# EAGLE board Proiect_v132 (EAGLE 9.7.0)
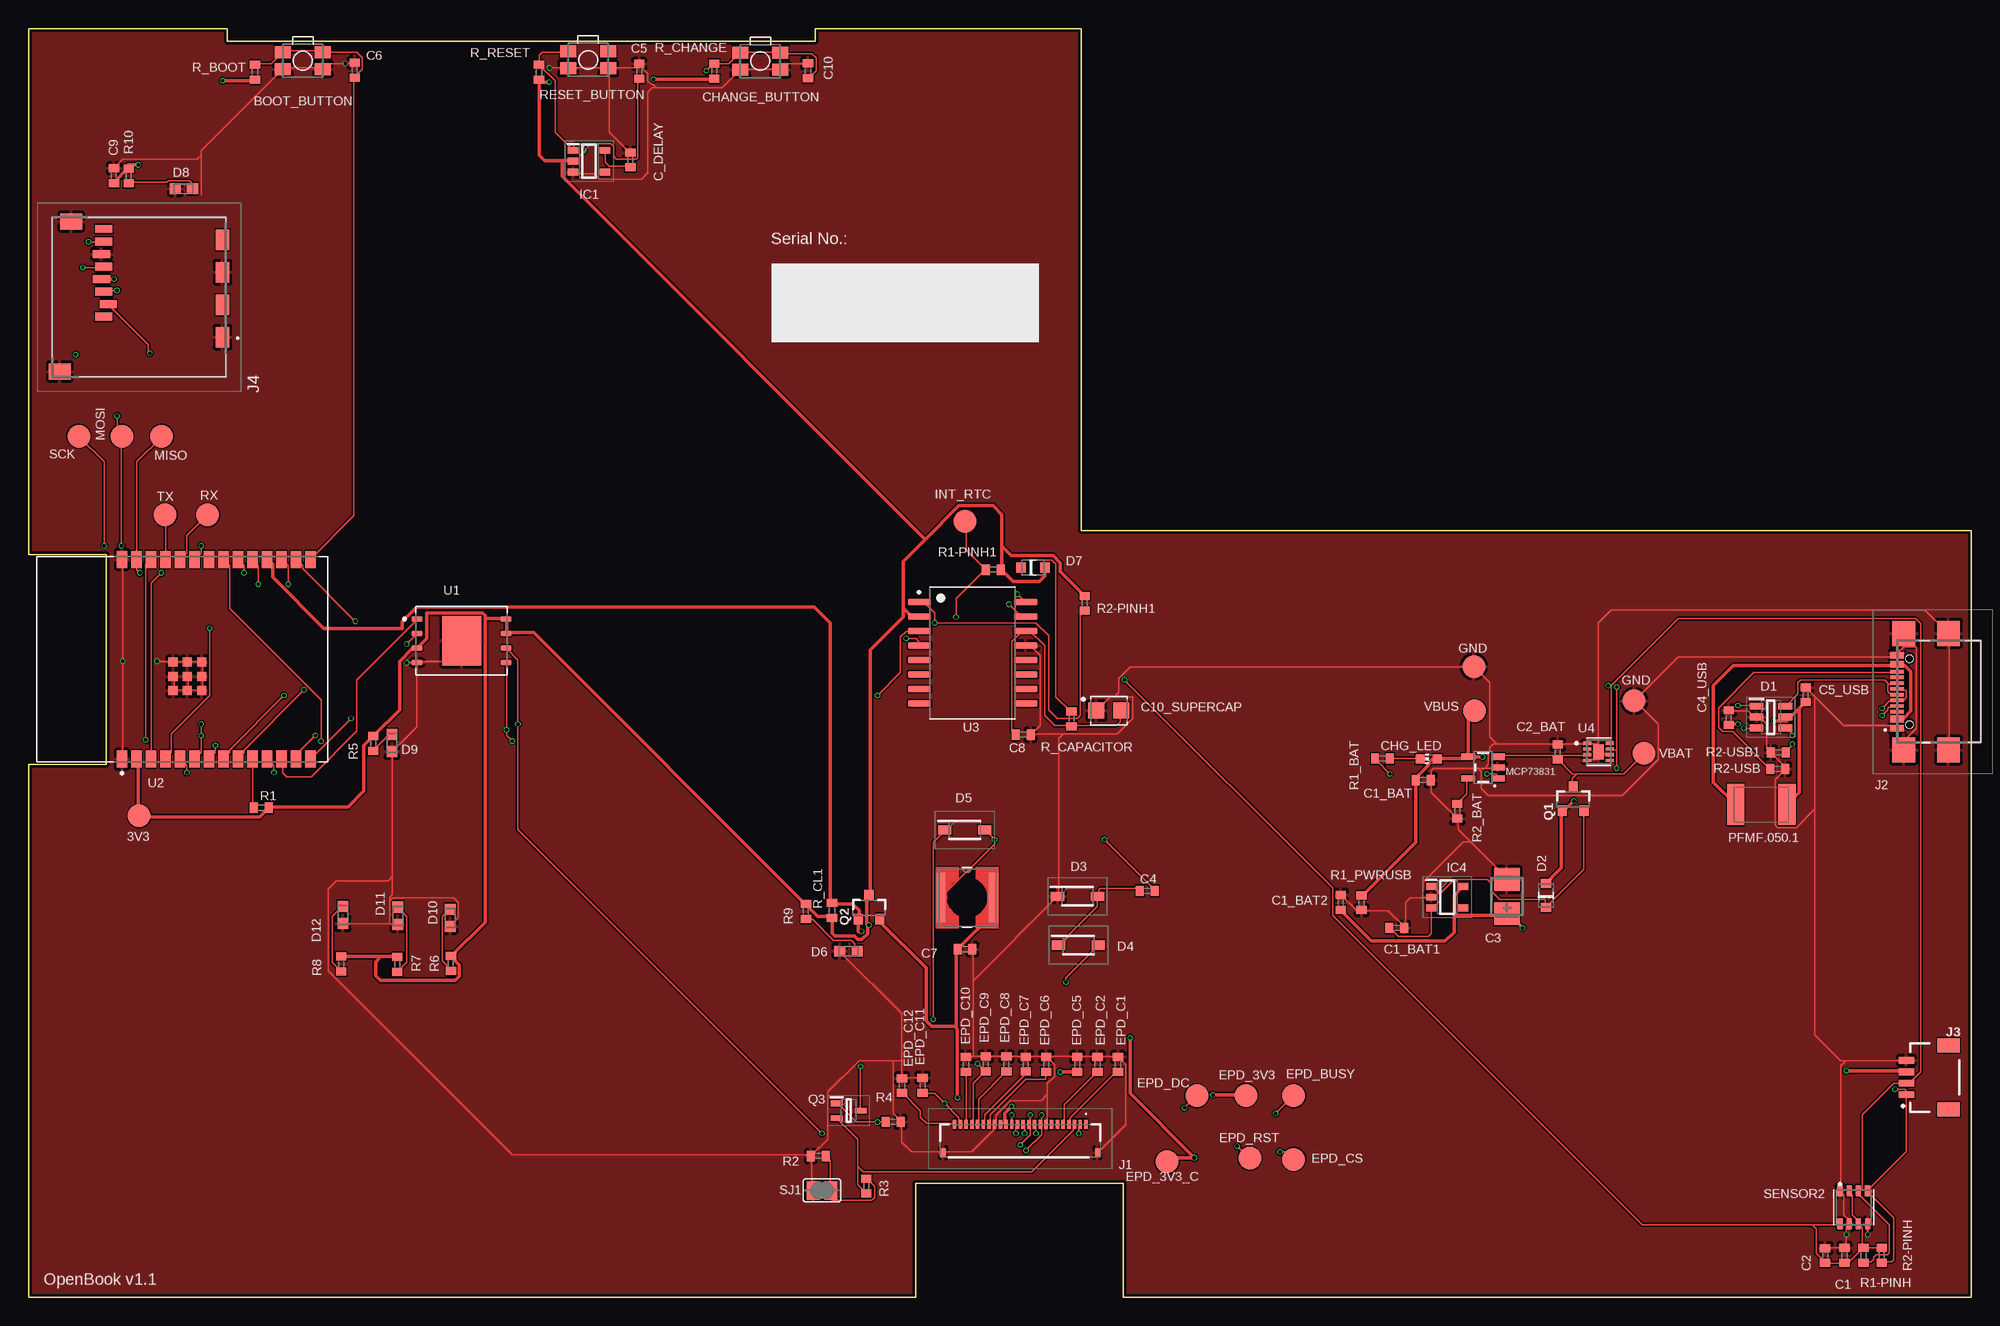
[diagram p0: board, top side]
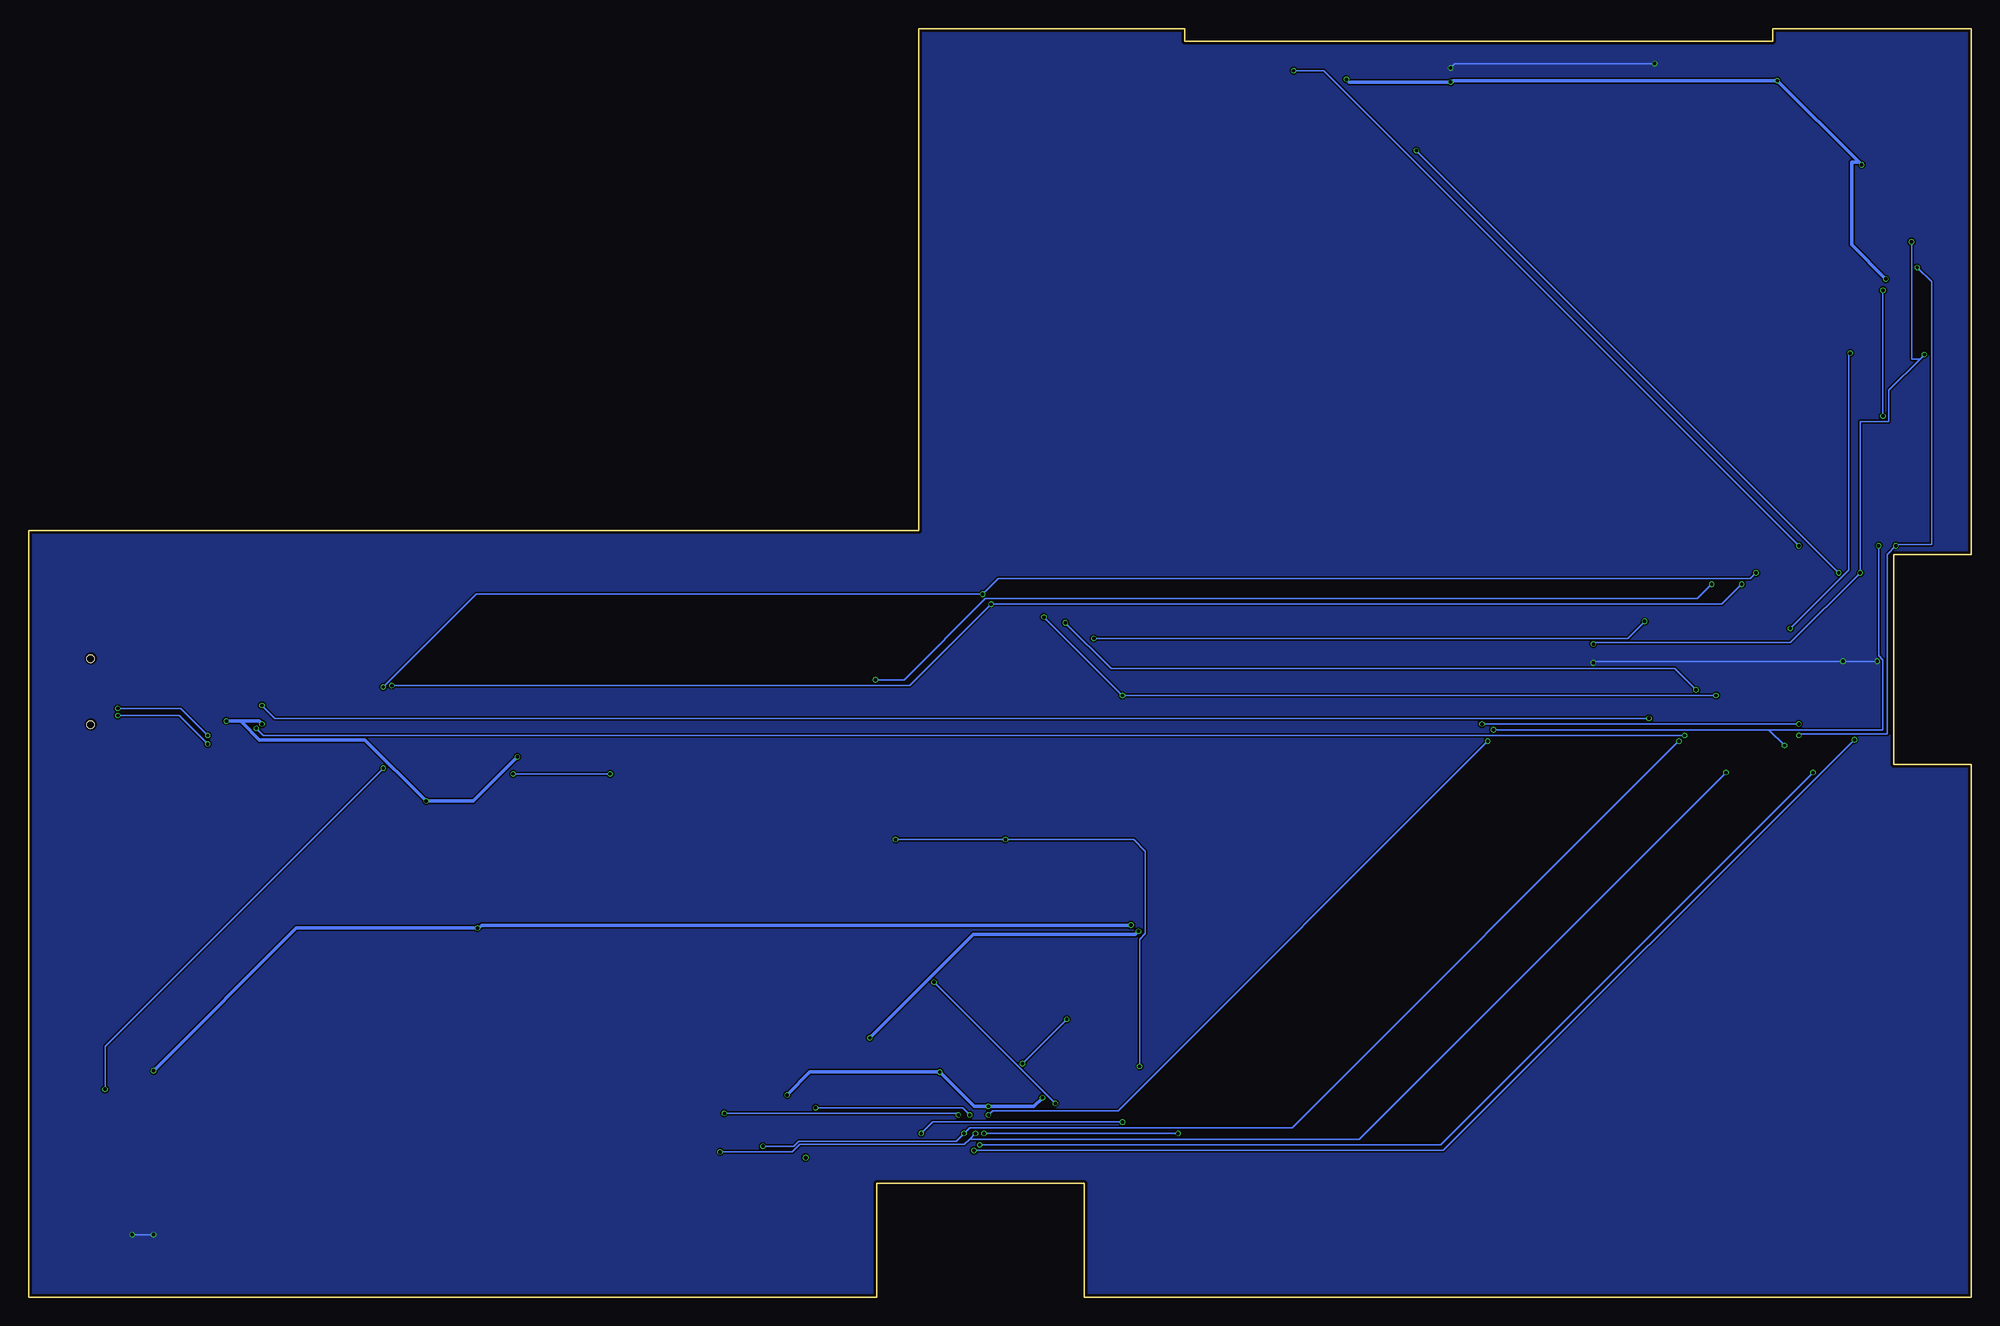
[diagram p1: board, bottom side, seen from below]

Size 170.2 x 111.2 mm. Coordinates in mm from the lower left corner, seen from the top.
Outline: 17.4,111.2 17.4,110.1 68.9,110.1 68.9,111.2 92.2,111.2 92.2,67.2 170.2,67.2 170.2,0 95.9,0 95.9,10 77.7,10 77.7,0 0,0 0,46.7 6.8,46.7 6.8,65.1 0,65.1 0,111.2 17.4,111.2
Copper layers (1*16): Top 0.035mm / dielectric 1.6mm / Bottom 0.035mm
Design rules "jlcpcb-2layers.dru": minimum track width 0.15mm, minimum drill 0.3mm, track to track 5mil, track to pad 5mil, pad to pad 5mil, via to via 5mil, smd to smd 5mil, copper to edge 0.2mm, drill to drill 6mil, minimum pad ring 10mil, minimum via ring 3mil, stop-mask expansion 4mil, vias tented up to drill 0mil, thermal gap 10mil
Net classes: 1 alimentare: width 0.3 mm

## Footprints (pad centres in the part's own frame; a part is rotated, then mirrored left to right if it is on the bottom)
MYBUTTON = smd 1.4 x 1.05: 1 1.75,0.75; 2 -1.75,0.75; 3 -1.75,-0.75; 4 1.75,-0.75
EAGLE-LTSPICE_C0402 = smd 0.7 x 0.9: 1 -0.65,0; 2 0.65,0
RCL_CT3528 = smd 2 x 2.2: + -1.5,0; - 1.5,0
CAPCP3225X100N = smd 1.4 x 1.4: 1 -1.1,0; 2 1.1,0
ADAFRUIT_CHIP-LED0603 = smd 0.8 x 0.8: A 0,-0.75; C 0,0.75
SOT95P280X145-6N = smd 1.2 x 0.6: 1 -1.25,0.95; 2 -1.25,0; 3 -1.25,-0.95; 4 1.25,-0.95; 5 1.25,0; 6 1.25,0.95
ESP32_WROVER_AVX---SD0805S020S1R0_AVX_SD0805S020S1R0_0 = smd 0.8 x 0.9: 1 -1.05,0; 2 1.05,0
SOD3716X135N = smd 1.15 x 0.8: 1 -1.75,0; 2 1.75,0
DIOC1608X36N = smd 0.97 x 0.94: 1 -0.75,0; 2 0.75,0
SOT95P280X125-5N = smd 0.9 x 0.6: 1 -1.4,0.95; 2 -1.4,0; 3 -1.4,-0.95; 4 1.4,-0.95; 5 1.4,0.95
SOT95P280X120-5N = smd 0.9 x 0.6: 1 -1.4,0.95; 2 -1.4,0; 3 -1.4,-0.95; 4 1.4,-0.95; 5 1.4,0.95
FH34SRJ24S05SH99 = smd 0.3 x 0.8: 1 5.75,1.45; 2 5.25,1.45; 3 4.75,1.45; 4 4.25,1.45; 5 3.75,1.45; 6 3.25,1.45; 7 2.75,1.45; 8 2.25,1.45; 9 1.75,1.45; 10 1.25,1.45; 11 0.75,1.45; 12 0.25,1.45; 13 -0.25,1.45; 14 -0.75,1.45; 15 -1.25,1.45; 16 -1.75,1.45; 17 -2.25,1.45; 18 -2.75,1.45; 19 -3.25,1.45; 20 -3.75,1.45; 21 -4.25,1.45; 22 -4.75,1.45; 23 -5.25,1.45; 24 -5.75,1.45 | smd 0.4 x 0.8: MP1 6.75,-1.05; MP2 -6.75,-1.05
SAMACSYS_PARTS_USB4110GFA = smd 0.3 x 1.15: A1 -3.35,3.678; A4 -2.55,3.678; A5 -1.25,3.678; A6 -0.25,3.678; A7 0.25,3.678; A8 1.25,3.678; A9 2.55,3.678; A12 3.35,3.678; B1 3.05,3.678; B4 2.25,3.678; B5 1.75,3.678; B6 0.75,3.678; B7 -0.75,3.678; B8 -1.75,3.678; B9 -2.25,3.678; B12 -3.05,3.678 | smd 2.18 x 2: MP1 -5.11,-0.827; MP2 5.11,-0.827; MP3 -5.11,3.103; MP4 5.11,3.103 | hole 0.65: -2.89,2.603; 2.89,2.603
JST04_1MM_RA = smd 0.6 x 1.35: 1 -1.5,0; 2 -0.5,0; 3 0.5,0; 4 1.5,0 | smd 1.2 x 2: NC1 2.8,-3.675; NC2 -2.8,-3.675
112ATAARR03ATTEND = smd 1.8 x 1.2: G1 10.6,10.4; G2 4.9,10.4; S1 7.75,10.4; S2 2.05,10.4 | smd 1.4 x 1.9: G3 13.6,-3.85; G4 0.45,-2.85 | smd 0.7 x 1.5: P1 8.8,0; P2 7.7,0.4; P3 6.6,0; P4 5.5,-0.2; P5 4.4,0; P6 3.3,-0.2; P7 2.2,0; P8 1.1,0
IND_4828-WE-TPC_WRE = smd 0.762 x 4.318: 1 -2.286,0; 2 2.286,0
ESP32_WROVER_SPARKFUN-IC-POWER_SOT23-5 = smd 0.55 x 1.2: 1 -0.95,-1.3; 2 0,-1.3; 3 0.95,-1.3; 4 0.95,1.3; 5 -0.95,1.3
ESP32C6_VARISTOR_CT/CN1812 = smd 1.5 x 3.6: 1 -2.25,0; 2 2.25,0
ESP32_WROVER_SPARKFUN-DISCRETESEMI_SOT23-3 = smd 0.8 x 0.9: 1 -0.95,-1; 2 0.95,-1; 3 0,1.1
SOT65P210X110-3N = smd 1.05 x 0.5: 1 -1.05,0.65; 2 -1.05,-0.65; 3 1.05,0
ESP32_WROVER_EAGLE-LTSPICE_R0402 = smd 0.7 x 0.9: 1 -0.65,0; 2 0.65,0
ESP32_WROVER_BME680_PSON80P300X300X100-8N = smd 1.016 x 0.5: 1 1.458,1.2; 2 1.458,0.4; 3 1.458,-0.4; 4 1.458,-1.2; 5 -1.458,-1.22; 6 -1.458,-0.4; 7 -1.458,0.4; 8 -1.458,1.2
SJ = smd 1.168 x 1.6: 1 -0.762,0; 2 0.762,0
TP20R = smd 2 x 2: TP 0,0
SON127P600X800X80-9N = smd 0.94 x 0.44: 1 -3.895,1.905; 2 -3.895,0.635; 3 -3.895,-0.635; 4 -3.895,-1.905; 5 3.895,-1.905; 6 3.895,-0.635; 7 3.895,0.635; 8 3.895,1.905 | smd 3.4 x 4.3: 9 0,0
XCVR_ESP32-C6-WROOM-1-N8 = smd 1.5 x 0.9: 1 -8.75,5.26; 2 -8.75,3.99; 3 -8.75,2.72; 4 -8.75,1.45; 5 -8.75,0.18; 6 -8.75,-1.09; 7 -8.75,-2.36; 8 -8.75,-3.63; 9 -8.75,-4.9; 10 -8.75,-6.17; 11 -8.75,-7.44; 12 -8.75,-8.71; 13 -8.75,-9.98; 14 -8.75,-11.25; 15 8.75,-11.25; 16 8.75,-9.98; 17 8.75,-8.71; 18 8.75,-7.44; 19 8.75,-6.17; 20 8.75,-4.9; 21 8.75,-3.63; 22 8.75,-2.36; 23 8.75,-1.09; 24 8.75,0.18; 25 8.75,1.45; 26 8.75,2.72; 27 8.75,3.99; 28 8.75,5.26 | smd 0.8 x 0.8: 29_1 -2.755,0.79; 29_2 -1.505,0.79; 29_3 -0.255,0.79; 29_4 -2.755,-0.46; 29_5 -1.505,-0.46; 29_6 -0.255,-0.46; 29_7 -2.755,-1.71; 29_8 -1.505,-1.71; 29_9 -0.255,-1.71
SOIC127P1032X265-16N = smd 2.05 x 0.59: 1 -4.655,4.445; 2 -4.655,3.175; 3 -4.655,1.905; 4 -4.655,0.635; 5 -4.655,-0.635; 6 -4.655,-1.905; 7 -4.655,-3.175; 8 -4.655,-4.445; 9 4.655,-4.445; 10 4.655,-3.175; 11 4.655,-1.905; 12 4.655,-0.635; 13 4.655,0.635; 14 4.655,1.905; 15 4.655,3.175; 16 4.655,4.445
SON50P200X200X80-9N = smd 0.76 x 0.27: 1 -0.985,0.75; 2 -0.985,0.25; 3 -0.985,-0.25; 4 -0.985,-0.75; 5 0.985,-0.75; 6 0.985,-0.25; 7 0.985,0.25; 8 0.985,0.75 | smd 0.9 x 1.3: 9 0,0

## Placement (x,y rotation side)
BOOT_BUTTON  BUTTON_CUSYOMV1.  [MYBUTTON]  24.03,108.39 180 top
C1  100nF  [EAGLE-LTSPICE_C0402]  159.08,3.69 90 top
C1_BAT  4.7uF  [EAGLE-LTSPICE_C0402]  122.18,45.34 0 top
C1_BAT1  4.7uF  [EAGLE-LTSPICE_C0402]  119.86,32.38 0 top
C1_BAT2  4.7uF  [EAGLE-LTSPICE_C0402]  114.94,34.63 90 top
C2  100nF  [EAGLE-LTSPICE_C0402]  157.38,3.67 90 top
C2_BAT  4.7uF  [EAGLE-LTSPICE_C0402]  133.96,47.79 90 top
C3  100uF  [RCL_CT3528]  129.51,35.14 90 top
C4  4.7uF/25V  [EAGLE-LTSPICE_C0402]  98.01,35.63 0 top
C4_USB  100nF  [EAGLE-LTSPICE_C0402]  148.94,50.81 90 top
C5  1uF  [EAGLE-LTSPICE_C0402]  53.5,107.46 90 top
C5_USB  4.7uF  [EAGLE-LTSPICE_C0402]  155.69,52.82 90 top
C6  100nF  [EAGLE-LTSPICE_C0402]  28.58,107.55 90 top
C7  10uF  [EAGLE-LTSPICE_C0402]  82.04,30.52 0 top
C8  100nF  [EAGLE-LTSPICE_C0402]  87.13,49.32 0 top
C9  100nF  [EAGLE-LTSPICE_C0402]  7.48,98.31 90 top
C10  100nF  [EAGLE-LTSPICE_C0402]  68.28,107.49 90 top
C10_SUPERCAP  CPH3225A  [CAPCP3225X100N]  94.64,51.43 0 top
C_DELAY  100nF  [EAGLE-LTSPICE_C0402]  52.72,99.68 90 top
CHANGE_BUTTON  BUTTON_CUSYOMV1.  [MYBUTTON]  64.11,108.35 180 top
CHG_LED  [ADAFRUIT_CHIP-LED0603]  122.66,47.19 90 top
D1  USBLC6-2SC6Y  [SOT95P280X145-6N]  152.63,50.86 0 top
D2  ESP32_WROVER_AVX---SD0805S020S1R0_AVX_SD0805S020S1R0_0_0AVX_SD0805S020S1R0_0_0  [ESP32_WROVER_AVX---SD0805S020S1R0_AVX_SD0805S020S1R0_0]  132.93,35.24 90 top
D3  MBR0530  [SOD3716X135N]  91.89,35.16 0 top
D4  MBR0530  [SOD3716X135N]  91.97,30.87 0 top
D5  MBR0530  [SOD3716X135N]  82.01,40.97 0 top
D6  PGB1010603MR.  [DIOC1608X36N]  71.83,30.36 0 top
D7  ESP32_WROVER_AVX---SD0805S020S1R0_AVX_SD0805S020S1R0_0_0AVX_SD0805S020S1R0_0_0  [ESP32_WROVER_AVX---SD0805S020S1R0_AVX_SD0805S020S1R0_0]  87.99,63.97 0 top
D8  PGB1010603MR.  [DIOC1608X36N]  13.61,97.16 0 top
D9  PGB1010603MR.  [DIOC1608X36N]  31.84,48.59 90 top
D10  PGB1010603MR.  [DIOC1608X36N]  36.94,33.27 90 top
D11  PGB1010603MR.  [DIOC1608X36N]  32.34,33.45 90 top
D12  PGB1010603MR.  [DIOC1608X36N]  27.54,33.53 90 top
EPD_C1  1uF/50V  [EAGLE-LTSPICE_C0402]  95.44,20.43 90 top
EPD_C2  1uF/50V  [EAGLE-LTSPICE_C0402]  93.64,20.44 90 top
EPD_C5  1uF/50V  [EAGLE-LTSPICE_C0402]  91.86,20.43 90 top
EPD_C6  1uF/50V  [EAGLE-LTSPICE_C0402]  89.16,20.44 90 top
EPD_C7  1uF/50V  [EAGLE-LTSPICE_C0402]  87.36,20.45 90 top
EPD_C8  1uF/50V  [EAGLE-LTSPICE_C0402]  85.66,20.46 90 top
EPD_C9  1uF/50V  [EAGLE-LTSPICE_C0402]  83.86,20.47 90 top
EPD_C10  1uF/50V  [EAGLE-LTSPICE_C0402]  82.12,20.42 90 top
EPD_C11  1uF/50V  [EAGLE-LTSPICE_C0402]  78.32,18.6 90 top
EPD_C12  1uF/50V  [EAGLE-LTSPICE_C0402]  76.52,18.56 90 top
IC1  BD5229G-TR  [SOT95P280X125-5N]  49.1,99.56 0 top
IC4  XC6220A331MR-GIC4  [SOT95P280X120-5N]  124.28,35.08 0 top
J1  FH34SRJ-24S-0.5SH_99_  [FH34SRJ24S05SH99]  86.88,13.73 0 top
J2  SAMACSYS_PARTS_USB4110-GF-A  [SAMACSYS_PARTS_USB4110GFA]  167.36,53.08 90 top
J3  QWIIC_RIGHT_ANGLE  [JST04_1MM_RA]  164.51,19.28 90 top
J4  112A-TAAR-R03_ATTEND  [112ATAARR03ATTEND]  6.59,94.74 270 top
L1  68uH  [IND_4828-WE-TPC_WRE]  82.22,35.04 0 top
MCP73831  ESP32_WROVER_SPARKFUN-IC-POWER_MCP73831  [ESP32_WROVER_SPARKFUN-IC-POWER_SOT23-5]  127.42,46.44 90 top
PFMF.050.1  ESP32C6_VARISTORCN1812  [ESP32C6_VARISTOR_CT/CN1812]  151.79,43.19 0 top
Q1  20V/4.2A/52mΩ/1.4W  [ESP32_WROVER_SPARKFUN-DISCRETESEMI_SOT23-3]  135.31,43.65 0 top
Q2  20V/4.2A/52mΩ/1.4W  [ESP32_WROVER_SPARKFUN-DISCRETESEMI_SOT23-3]  73.63,34.15 0 top
Q3  SI1308EDL-T1-GE3  [SOT65P210X110-3N]  71.84,16.37 0 top
R1  10K  [ESP32_WROVER_EAGLE-LTSPICE_R0402]  20.4,42.92 0 top
R1-PINH  10K  [ESP32_WROVER_EAGLE-LTSPICE_R0402]  160.74,3.69 90 top
R1-PINH1  10K  [ESP32_WROVER_EAGLE-LTSPICE_R0402]  84.5,63.78 0 top
R1_BAT  200  [ESP32_WROVER_EAGLE-LTSPICE_R0402]  118.6,47.24 0 top
R1_PWRUSB  100K  [ESP32_WROVER_EAGLE-LTSPICE_R0402]  116.77,34.6 90 top
R2  2.2  [ESP32_WROVER_EAGLE-LTSPICE_R0402]  69.18,12.4 0 top
R2-PINH  10K  [ESP32_WROVER_EAGLE-LTSPICE_R0402]  162.34,3.7 90 top
R2-PINH1  10K  [ESP32_WROVER_EAGLE-LTSPICE_R0402]  92.52,60.84 90 top
R2-USB  5k1  [ESP32_WROVER_EAGLE-LTSPICE_R0402]  153.23,46.32 0 top
R2-USB1  5k1  [ESP32_WROVER_EAGLE-LTSPICE_R0402]  153.27,47.76 0 top
R2_BAT  2K  [ESP32_WROVER_EAGLE-LTSPICE_R0402]  125.16,42.61 90 top
R3  0.47  [ESP32_WROVER_EAGLE-LTSPICE_R0402]  73.38,9.76 90 top
R4  10K  [ESP32_WROVER_EAGLE-LTSPICE_R0402]  75.74,15.4 0 top
R5  10K  [ESP32_WROVER_EAGLE-LTSPICE_R0402]  30.2,48.56 90 top
R6  10K  [ESP32_WROVER_EAGLE-LTSPICE_R0402]  37,29.28 90 top
R7  10K  [ESP32_WROVER_EAGLE-LTSPICE_R0402]  32.3,29.2 90 top
R8  10K  [ESP32_WROVER_EAGLE-LTSPICE_R0402]  27.4,29.22 90 top
R9  10K  [ESP32_WROVER_EAGLE-LTSPICE_R0402]  68.1,33.84 90 top
R10  10K  [ESP32_WROVER_EAGLE-LTSPICE_R0402]  8.78,98.28 90 top
R_BOOT  10K  [ESP32_WROVER_EAGLE-LTSPICE_R0402]  19.84,107.38 90 top
R_CAPACITOR  15  [ESP32_WROVER_EAGLE-LTSPICE_R0402]  91.37,50.7 90 top
R_CHANGE  10K  [ESP32_WROVER_EAGLE-LTSPICE_R0402]  60.07,107.47 90 top
R_CL1  10K  [ESP32_WROVER_EAGLE-LTSPICE_R0402]  70.38,33.91 90 top
R_RESET  10K  [ESP32_WROVER_EAGLE-LTSPICE_R0402]  44.72,107.36 90 top
RESET_BUTTON  BUTTON_CUSYOMV1.  [MYBUTTON]  49.02,108.45 180 top
SENSOR2  ESP32_WROVER_BME680_BME680  [ESP32_WROVER_BME680_PSON80P300X300X100-8N]  159.89,7.9 90 top
SJ1  [SJ]  69.51,9.38 0 top
TP1  TPTP20R  [TP20R]  11.96,68.58 0 top
TP2  TPTP20R  [TP20R]  15.68,68.58 0 top
TP3  TPTP20R  [TP20R]  141.5,47.68 0 top
TP4  TPTP20R  [TP20R]  126.62,55.28 0 top
TP5  TPTP20R  [TP20R]  140.64,52.28 0 top
TP6  TPTP20R  [TP20R]  11.66,75.48 0 top
TP7  TPTP20R  [TP20R]  8.18,75.48 0 top
TP8  TPTP20R  [TP20R]  4.4,75.48 0 top
TP9  TPTP20R  [TP20R]  110.82,17.68 0 top
TP10  TPTP20R  [TP20R]  110.83,12.1 0 top
TP11  TPTP20R  [TP20R]  102.34,17.68 0 top
TP12  TPTP20R  [TP20R]  106.98,12.2 0 top
TP13  TPTP20R  [TP20R]  99.73,11.9 0 top
TP14  TPTP20R  [TP20R]  126.68,51.4 0 top
TP15  TPTP20R  [TP20R]  82.03,68 0 top
TP16  TPTP20R  [TP20R]  9.68,42.2 0 top
TP17  TPTP20R  [TP20R]  106.63,17.7 0 top
U1  W25Q512JVEIQ  [SON127P600X800X80-9N]  37.94,57.55 0 top
U2  ESP32-C6-WROOM-1-N8  [XCVR_ESP32-C6-WROOM-1-N8]  13.45,55.93 90 top
U3  DS3231SN#  [SOIC127P1032X265-16N]  82.7,56.49 0 top
U4  MAX17048G+T10  [SON50P200X200X80-9N]  137.53,47.81 0 top

## Library data of the parts
BOOT_BUTTON C1 C1_BAT C1_BAT1 C1_BAT2 C2 C2_BAT C4 C4_USB C5 C5_USB C6-C10 C_DELAY CHANGE_BUTTON CHG_LED D6 D8-D12 EPD_C1 EPD_C2 EPD_C5-EPD_C12 IC4 PFMF.050.1 R1 R1-PINH R1-PINH1 R1_BAT R1_PWRUSB R2 R2-PINH R2-PINH1 R2-USB R2-USB1 R2_BAT R3-R10 R_BOOT R_CAPACITOR R_CHANGE R_CL1 R_RESET RESET_BUTTON SJ1 TP1-TP17 = DeskAssistant v19 v1
C3 = DeskAssistant v19 v1; SPICEPREFIX: C
C10_SUPERCAP = DeskAssistant v19 v1; AVAILABILITY: Not in stock; CHECK_PRICES: https://www.snapeda.com/parts/CPH3225A/Seiko+Instruments/view-part/?ref=eda; DESCRIPTION: 11 mF (EDLC) Supercapacitor 3.3 V 1210 (3225 Metric) - -; MF: Seiko Instruments; MP: CPH3225A; PACKAGE: 1210 Seiko; PRICE: None; PURCHASE-URL: https://www.snapeda.com/api/url_track_click_mouser/?unipart_id=562593&manufacturer=Seiko Instruments&part_name=CPH3225A&search_term=None; SNAPEDA_LINK: https://www.snapeda.com/parts/CPH3225A/Seiko+Instruments/view-part/?ref=snap
D1 = DeskAssistant v19 v1; AVAILABILITY: In Stock; CHECK_PRICES: https://www.snapeda.com/parts/USBLC6-2SC6Y/STMicroelectronics/view-part/?ref=eda; DESCRIPTION: 17V Clamp 5A (8/20µs) Ipp Tvs Diode Surface Mount SOT-23-6; MF: STMicroelectronics; MP: USBLC6-2SC6Y; PACKAGE: SOT-23-6 STMicroelectronics; PRICE: None; SNAPEDA_LINK: https://www.snapeda.com/parts/USBLC6-2SC6Y/STMicroelectronics/view-part/?ref=snap
D2 D7 = DeskAssistant v19 v1; ATR: SD0805S020S1R0; CENTROID_NOT_SPECIFIED: No; DATASHEET: http://datasheets.avx.com/schottky.pdf; DIGIKEY_DESCRIPTION: DIODE SCHOTTKY 20V 1A 0805; DIGIKEY_PART_NUMBER: 478-7800-1-ND; LEAD_FREE: yes; MF: AVX; MOUSER_PART_NUMBER: 581-SD0805S020S1R0; PACKAGE: 0805 (2012 metric); PREFIX: D; ROHS: yes; TEMPERATURE_RANGE_HIGH: +125°C; TEMPERATURE_RANGE_LOW: -55°C
D3-D5 = DeskAssistant v19 v1; AVAILABILITY: In Stock; CHECK_PRICES: https://www.snapeda.com/parts/MBR0530/Onsemi/view-part/?ref=eda; DESCRIPTION: Diode Schottky 30 V 500mA Surface Mount SOD-123; MF: ON Semiconductor; MP: MBR0530; PACKAGE: SOD-123-2 ON Semiconductor; PRICE: None; PURCHASE-URL: https://www.snapeda.com/api/url_track_click_mouser/?unipart_id=179458&manufacturer=ON Semiconductor&part_name=MBR0530&search_term=None; SNAPEDA_LINK: https://www.snapeda.com/parts/MBR0530/Onsemi/view-part/?ref=snap
IC1 = DeskAssistant v19 v1; DESCRIPTION: Voltage Detector with Adjustable Delay Time: CMOS processes are utilized to develop high precision, low current consumption CMOS reset ICs that allow arbitrary setting of the delay time. The extensive lineup includes both Nch Open Drain and CMOS output types in a wide range of detection voltages (from 2.3V to 6.0V, in 0.1V steps), enabling selection of the ideal solution based on customer requirements. In addition, the entire series is of course both lead-free and RoHS-compliant.; HEIGHT: 1.25mm; MANUFACTURER_NAME: ROHM Semiconductor; MANUFACTURER_PART_NUMBER: BD5229G-TR; MOUSER_PART_NUMBER: 755-BD5229G-TR; MOUSER_PRICE-STOCK: https://www.mouser.co.uk/ProductDetail/ROHM-Semiconductor/BD5229G-TR?qs=4kLU8WoGk0vvnhrrYwdszw%3D%3D
J1 = DeskAssistant v19 v1; DESCRIPTION: 24 Position FFC, FPC Connector Contacts, Top and Bottom 0.020" (0.50mm) Surface Mount, Right Angle; HEIGHT: 1.1mm; MANUFACTURER_NAME: Hirose; MANUFACTURER_PART_NUMBER: FH34SRJ-24S-0.5SH(99); MOUSER_PART_NUMBER: 798-FH34SRJ24S05SH99; MOUSER_PRICE-STOCK: https://www.mouser.co.uk/ProductDetail/Hirose-Connector/FH34SRJ-24S-0.5SH99?qs=vcbW%252B4%252BSTIpKBl5ap9J8Fw%3D%3D
J2 = DeskAssistant v19 v1; DESCRIPTION: CONN USB 2.0 TYPE-C R/A SMT; HEIGHT: 3.26mm; MANUFACTURER_NAME: GCT (GLOBAL CONNECTOR TECHNOLOGY); MANUFACTURER_PART_NUMBER: USB4110-GF-A; MOUSER_PART_NUMBER: 640-USB4110-GF-A; MOUSER_PRICE-STOCK: https://www.mouser.co.uk/ProductDetail/GCT/USB4110-GF-A?qs=KUoIvG%2F9IlYiZvIXQjyJeA%3D%3D
J3 = DeskAssistant v19 v1; PROD_ID: CONN-13694
J4 = DeskAssistant v19 v1; DESCRIPTION: Micro SD Card Socket, Push-Push Type, Top Mount, SMT, H=1.83mm, 10u; HEIGHT: 1.9mm; MANUFACTURER_NAME: ATTEND; MANUFACTURER_PART_NUMBER: 112A-TAAR-R03 ATTEND
L1 = DeskAssistant v19 v1; COPYRIGHT: Copyright (C) 2024 Ultra Librarian. All rights reserved.; MANUFACTURER_PART_NUMBER: 744043680; MFR_NAME: Wurth Electronics
MCP73831 = DeskAssistant v19 v1; PROD_ID: IC-09995
Q1 Q2 = DeskAssistant v19 v1; ATR: DMG2305UX-7; PROD_ID: TRAN-14388
Q3 = DeskAssistant v19 v1; AVAILABILITY: In Stock; CHECK_PRICES: https://www.snapeda.com/parts/SI1308EDL-T1-GE3/Vishay+Siliconix/view-part/?ref=eda; DESCRIPTION: Si1308EDL-T1-GE3 N-channel MOSFET Transistor, 1.5 A, 30 V, 3-Pin SC-70 | Siliconix / Vishay SI1308EDL-T1-GE3; MF: Vishay Siliconix; MP: SI1308EDL-T1-GE3; PACKAGE: SOT-323 Vishay Semiconductor; PRICE: None; PURCHASE-URL: https://www.snapeda.com/api/url_track_click_mouser/?unipart_id=274603&manufacturer=Vishay Siliconix&part_name=SI1308EDL-T1-GE3&search_term=None; SNAPEDA_LINK: https://www.snapeda.com/parts/SI1308EDL-T1-GE3/Vishay+Siliconix/view-part/?ref=snap
SENSOR2 = DeskAssistant v19 v1; ATR: BME688; AVAILABILITY: Unavailable; DESCRIPTION: Integrated Environmental Unit; MF: Bosch Sensortec; MP: BME680; PACKAGE: LGA-8 Bosch Tools; PRICE: None
U1 = DeskAssistant v19 v1; AVAILABILITY: In Stock; CHECK_PRICES: https://www.snapeda.com/parts/W25Q512JVEIQ/Winbond+Electronics/view-part/?ref=eda; DESCRIPTION: FLASH - NOR Memory IC 512Mb (64M x 8) SPI - Quad I/O 133 MHz 8-WSON (8x6); MF: Winbond Electronics; MP: W25Q512JVEIQ; PACKAGE: Package; PRICE: None; SNAPEDA_LINK: https://www.snapeda.com/parts/W25Q512JVEIQ/Winbond+Electronics/view-part/?ref=snap
U2 = DeskAssistant v19 v1; AVAILABILITY: In Stock; CHECK_PRICES: https://www.snapeda.com/parts/ESP32-C6-WROOM-1-N8/Espressif+Systems/view-part/?ref=eda; DESCRIPTION: Multiprotocol Modules ESP32-C6 module, Wi-Fi 6 in 2.4 GHz band, Bluetooth 5, Zigbee 3.0 and Thread. ESP34-WROOM Compatible - ENGINEERING SAMPLE; MF: Espressif Systems; MP: ESP32-C6-WROOM-1-N8; PACKAGE: None; PRICE: None; SNAPEDA_LINK: https://www.snapeda.com/parts/ESP32-C6-WROOM-1-N8/Espressif+Systems/view-part/?ref=snap
U3 = DeskAssistant v19 v1; AVAILABILITY: In Stock; CHECK_PRICES: https://www.snapeda.com/parts/DS3231SN%23/Analog+Devices/view-part/?ref=eda; DESCRIPTION: Extremely Accurate I²C-Integrated RTC/TCXO/Crystal; MF: Analog Devices; MP: DS3231SN#; PACKAGE: SOIC-16 Maxim; PRICE: None; PURCHASE-URL: https://www.snapeda.com/api/url_track_click_mouser/?unipart_id=99048&manufacturer=Analog Devices&part_name=DS3231SN#&search_term=None; SNAPEDA_LINK: https://www.snapeda.com/parts/DS3231SN%23/Analog+Devices/view-part/?ref=snap
U4 = DeskAssistant v19 v1; AVAILABILITY: In Stock; CHECK_PRICES: https://www.snapeda.com/parts/MAX17048G+T10/Analog+Devices/view-part/?ref=eda; DESCRIPTION: 3µA 1-Cell/2-Cell Fuel Gauge with ModelGauge; MF: Analog Devices; MP: MAX17048G+T10; PACKAGE: TDFN-8 Maxim; PRICE: None; PURCHASE-URL: https://www.snapeda.com/api/url_track_click_mouser/?unipart_id=329239&manufacturer=Analog Devices&part_name=MAX17048G+T10&search_term=None; SNAPEDA_LINK: https://www.snapeda.com/parts/MAX17048G+T10/Analog+Devices/view-part/?ref=snap

## Nets
3V3 [alimentare]: C1_BAT2.1 C3.+ C9.1 D7.2 IC1.2 IC4.5 J3.3 J4.P4 Q2.3 R1-PINH1.2 R1.2 R2-PINH1.2 R5.2 R6.2 R7.2 R8.2 R9.2 R10.2 R_BOOT.1 R_CHANGE.1 R_CL1.1 R_RESET.1 TP16.TP U1.3 U1.7 U1.8 U2.2 U3.2
32KHZ: R2-PINH1.1 U2.9 U3.1
DN: D1.4 J2.A7 J2.B7
DP: D1.6 J2.A6 J2.B6
EPD_3V3 [alimentare]: C7.1 EPD_C5.1 J1.15 J1.16 L1.2 Q2.2 TP17.TP
EPD_3V3_C [alimentare]: Q2.1 R_CL1.2 TP13.TP U2.18
EPD_BUSY: J1.9 TP9.TP U2.26
EPD_CS: J1.12 TP10.TP U2.11
EPD_DC: J1.11 TP11.TP U2.5
EPD_RST: J1.10 TP12.TP U2.21
FLASH_CS: U1.1 U2.12
GDR: J1.2 Q3.1 R4.1
GND: BOOT_BUTTON.1 BOOT_BUTTON.2 C1.2 C1_BAT1.2 C1_BAT2.2 C1_BAT.2 C2.2 C2_BAT.2 C3.- C4_USB.2 C5.2 C5_USB.2 C6.2 C7.2 C8.2 C9.2 C10.2 C10_SUPERCAP.1 C_DELAY.2 CHANGE_BUTTON.1 CHANGE_BUTTON.2 D1.2 D3.1 D6.1 D8.1 D9.1 D10.1 D11.1 D12.1 EPD_C1.2 EPD_C2.2 EPD_C5.2 EPD_C6.2 EPD_C7.2 EPD_C8.2 EPD_C9.2 EPD_C10.2 EPD_C11.2 EPD_C12.2 IC1.3 IC4.2 J1.8 J1.17 J1.MP1 J1.MP2 J2.A1 J2.A12 J2.B1 J2.B12 J2.MP1 J2.MP2 J2.MP3 J2.MP4 J3.4 J4.G1 J4.G2 J4.G3 J4.G4 J4.P6 MCP73831.2 R1_PWRUSB.1 R2-USB1.1 R2-USB.2 R2.1 R2_BAT.1 R4.2 RESET_BUTTON.1 RESET_BUTTON.2 SENSOR2.1 SENSOR2.5 SENSOR2.7 SJ1.1 TP4.TP TP5.TP U1.4 U1.9 U2.1 U2.28 U2.29_1 U2.29_2 U2.29_3 U2.29_4 U2.29_5 U2.29_6 U2.29_7 U2.29_8 U2.29_9 U3.13 U4.1 U4.4 U4.6 U4.9
GPIO8: R1.1 U2.10
I2C_PW: C1.1 C2.1 R1-PINH.2 R2-PINH.2 SENSOR2.2 SENSOR2.6 SENSOR2.8 U2.17
INT_RTC: R1-PINH1.1 TP15.TP U2.8 U3.3
IO/BOOT: BOOT_BUTTON.3 BOOT_BUTTON.4 C6.1 R_BOOT.2 U2.15
IO/CHANGE: C10.1 CHANGE_BUTTON.3 CHANGE_BUTTON.4 R_CHANGE.2 U2.23
MISO: J4.P7 TP6.TP U1.2 U2.27
MOSI: J1.14 J4.P3 TP7.TP U1.5 U2.7
N$1: J2.B5 R2-USB.1
N$2: C_DELAY.1 IC1.5
N$3: EPD_C12.1 J1.24
N$4: C1_BAT1.1 D2.1 IC4.1 IC4.3 Q1.2
N$5: MCP73831.5 R2_BAT.2
N$6: CHG_LED.C R1_BAT.2
N$8: MCP73831.1 R1_BAT.1
N$9: C4.1 D3.2 D4.1
N$10: D12.2 R8.1
N$11: J2.A5 R2-USB1.2
N$12: D11.2 R7.1
N$13: EPD_C10.1 J1.22
N$14: D10.2 R6.1
N$15: EPD_C8.1 J1.20
N$16: EPD_C7.1 J1.19
N$17: EPD_C6.1 J1.18
N$18: D9.2 R5.1
N$19: D6.2 R9.1
N$20: D8.2 R10.1
N$21: D7.1 R_CAPACITOR.2
N$26: EPD_C2.1 J1.5
N$28: EPD_C1.1 J1.4
PREVGH: D5.1 EPD_C9.1 J1.21
PREVGL: D4.2 EPD_C11.1 J1.23
RESE: J1.3 Q3.2 R3.1
RESE': R2.2 R3.2 SJ1.2
RESET: C5.1 IC1.1 R_RESET.2 RESET_BUTTON.4 U2.3
RTC_RST: U2.16 U3.4
RX: TP2.TP U2.24
SCK: J1.13 J4.P5 TP8.TP U1.6 U2.6
SCL: J3.1 R2-PINH.1 SENSOR2.4 U2.20 U3.16 U4.7
SDA: J3.2 R1-PINH.1 SENSOR2.3 U2.19 U3.15 U4.8
SRC: C4.2 D5.2 L1.1 Q3.3
SS_SD: J4.P2 U2.4
TX: TP1.TP U2.25
USB_D+: D1.1 U2.14
USB_D-: D1.3 U2.13
VBAT: C2_BAT.1 MCP73831.3 Q1.3 TP3.TP U4.2 U4.3
VBUS [alimentare]: C1_BAT.1 C4_USB.1 C5_USB.1 CHG_LED.A D1.5 D2.2 MCP73831.4 PFMF.050.1.2 Q1.1 R1_PWRUSB.2 TP14.TP
VRTC: C8.1 C10_SUPERCAP.2 R_CAPACITOR.1 U3.14
VUSB [alimentare]: J2.A4 J2.A9 J2.B4 J2.B9 PFMF.050.1.1

## Tracks (layer width: path | path; a pad name or v marks a point on that pad's centre or on a via)
3V3  (via drill 0.3)
  Top 0.3: 46.75,99.62 45.23,99.62 44.75,100.1 44.75,106.62 R_RESET.1 44.88,106.5 v45.62,106.5 | 46.75,99.62 47.62,99.62 IC1.2 | v54.75,106.75 60,106.75 R_CHANGE.1 | v17,106.62 19.75,106.62 R_BOOT.1 | v9.62,99.25 8.73,99.25 R10.2 8.75,99 7.5,97.75 C9.1 | 124.88,33.5 124.88,35.25 125.62,36 IC4.5 | 124.88,33.5 124.88,32 124.12,31.25 117.62,31.25 115,33.88 C1_BAT2.1 | v159.25,19.88 164.5,19.88 J3.3 | v130.88,32.38 129.62,33.62 C3.+ 129.38,33.62 129.38,33.5 124.88,33.5 | 73.5,32.62 73.5,31.88 73,31.38 72.62,31.38 72.34,31.66 70.64,31.66 70.39,31.91 70.39,33.25 R_CL1.1 70.38,33.38 69.12,33.38 68.12,34.38 R9.2 68,34.5 44.25,58.25 42,58.25 U1.7 41.88,58.25 41.88,59.38 U1.8 41.75,59.5 40,59.5 | D7.2 89,63.88 89,63.2 88.55,62.75 86.25,62.75 85.25,63.75 R1-PINH1.2 85.25,63.88 85.25,65.85 | R2-PINH1.2 92.5,61.5 90.38,63.62 90.38,64.38 89.75,65 86.1,65 85.25,65.85 | 76.62,60.4 76.62,64.5 78.56,66.44 | 76.62,60.4 76.62,59.62 73.75,56.75 73.75,35.55 Q2.3 73.43,35.05 73.43,32.7 73.5,32.62 | 78.56,66.44 81.5,69.38 84.5,69.38 85.25,68.62 85.25,65.85 | U3.2 78,59.75 77.28,59.75 76.62,60.4 | U2.2 9.5,47.12 9.62,47 9.62,44.25 9.62,42.25 TP16.TP 9.75,42.12 20.25,42.12 21,42.88 R1.2 21.12,43 28,43 29.38,44.38 29.38,48.38 30.12,49.12 R5.2 30.25,49.25 32.5,51.5 32.5,55.75 33.62,56.88 34,56.88 U1.3 34.12,57 34.88,57.75 34.88,60 39.75,60 40,59.75 40,59.5 | 30.88,29.88 32.25,29.88 R7.2 | 30.88,29.88 27.5,29.88 R8.2 | 40,59.5 40,32.88 37.12,30 R6.2 37,29.88 37.75,29.12 37.75,28.12 37.4,27.77 30.82,27.77 30.4,28.2 30.4,29.4 30.88,29.88 | v73.62,32.62 73.5,32.62 | 46.75,99.62 46.75,98.25 78.56,66.44
  Top 0.3: v7.5,89.25 6.5,89.25 J4.P4
  Bottom 0.3: v54.75,106.75 54.5,106.5 v45.62,106.5 45.5,106.5 45.38,106.62 v17,106.62 9.94,99.56 | v9.62,99.25 9.94,99.56 | v159.25,19.88 146.75,32.38 v130.88,32.38 130.75,32.38 130.5,32.62 v73.62,32.62 | v7.5,89.25 10.5,92.25 10.5,99.5 10,99.5 9.94,99.56
32KHZ  (via drill 0.3)
  Top 0.15: R2-PINH1.1 92.5,60.12 92.12,59.75 92.12,51 91.88,50.75 90.12,50.75 89.38,51.5 89.38,58 88.25,59.12 v79.38,59.12 79.38,60 78.5,60.88 78.12,60.88 U3.1 | v24.12,53.25 18.88,48 18.88,47.75 18.38,47.25 U2.9
  Bottom 0.15: v24.12,53.25 26,55.12 75.38,55.12 v79.38,59.12
DN  (via drill 0.3)
  Top 0.15: J2.A7 163.75,53.25 164.38,53.25 164.5,53.12 164.5,52.58 164.3,52.38 163.75,52.38 J2.B7 163.62,52.25 163,52.25 v162.38,51.62 | v154.5,49.25 154.5,49.38 154,49.88 D1.4
  Bottom 0.15: v154.5,49.25 156.88,51.62 v162.38,51.62
DP
  Top 0.15: 162.88,53.62 162.88,53.1 163.1,52.88 163.62,52.88 J2.A6 | 162.88,53.62 163,53.75 163.62,53.75 J2.B6 | 162.88,53.62 162.88,53.85 162.6,54.12 155.25,54.12 155,53.88 155,52.88 154,51.88 D1.6
EPD_3V3  (via drill 0.3)
  Top 0.3: L1.2 84.5,35 84.5,33.62 81.5,30.62 C7.1 81.25,30.5 81.25,23.75 | 81.25,23.75 79.12,23.75 78.62,24.25 78.62,28.88 74.58,32.92 Q2.2 | J1.16 85.25,15.25 85.62,15.25 J1.15 85.5,15.38 85.5,16.12 v86.12,16.75 | v90.38,19.75 91.75,19.75 EPD_C5.1 | v103.75,17.75 106.62,17.75 TP17.TP | v81.38,17.5 81.38,23.5 81.25,23.62 81.25,23.75
  Bottom 0.3: v103.75,17.75 101.75,19.75 v90.38,19.75 87.38,16.75 v86.12,16.75 82.12,16.75 v81.38,17.5
EPD_3V3_C  (via drill 0.3, 0.35)
  Top 0.3: U2.18 21,64.62 21.38,64.25 21.38,63.12 25.88,58.62 32.75,58.62 32.75,59.25 34,60.5 68.85,60.5 70.25,59.1 70.25,34.62 R_CL1.2 70.5,34.5 72.15,34.5 72.75,33.9 72.75,33.21 Q2.1 72.68,32.09 v72.97,32.09 | v96.5,22.75 96.5,17.88 v102.12,12.25 99.8,12.25 TP13.TP
  Bottom 0.3: v96.5,22.75 87.45,31.8 73.26,31.8 v72.97,32.09
EPD_BUSY  (via drill 0.3)
  Top 0.15: v88.75,16 88.75,15.25 J1.9 88.75,15.12 88.75,14.25 v87.38,12.88 | v109.25,16.12 110.75,17.62 TP9.TP | v10.25,48.88 10.25,64.25 10.62,64.62 U2.26
  Bottom 0.15: v88.75,16 88.88,16.12 v109.25,16.12 | v10.25,48.88 46.25,12.88 v87.38,12.88
EPD_CS  (via drill 0.3)
  Top 0.15: v87.25,14.38 87.25,15.12 J1.12 | v109.62,12.75 110.75,12.75 110.75,12.12 TP10.TP | v21.5,46 21.5,46.62 21,47.12 U2.11
  Bottom 0.15: 87.75,13.88 v87.25,14.38 | v21.5,46 53.62,13.88 87.75,13.88 | v109.62,12.75 103.28,12.75 102.63,13.4 88.22,13.4 87.75,13.88
EPD_DC  (via drill 0.3)
  Top 0.15: v87.75,16 87.75,15.25 J1.11 87.75,15.12 87.75,14.25 v86.88,13.38 | v101.25,16.62 102.25,17.62 TP11.TP | v13.88,46 13.88,46.62 13.38,47.12 U2.5
  Bottom 0.15: v87.75,16 88.38,16.62 v101.25,16.62 | v13.88,46 46.5,13.38 v86.88,13.38
EPD_RST  (via drill 0.3)
  Top 0.15: v88.25,14.38 88.25,15.12 J1.10 | v105.88,13.25 106.88,12.25 TP12.TP | v25.62,48.75 25.62,52.38 17.62,60.38 17.62,64.12 17.12,64.62 U2.21
  Bottom 0.15: v25.62,48.75 59.5,14.88 87.75,14.88 v88.25,14.38 88.95,13.68 102.74,13.68 103.17,13.25 v105.88,13.25
FLASH_CS
  Top 0.15: U1.1 34,59.38 28.75,54.12 28.75,49.62 24.75,45.62 22.6,45.62 22.25,45.98 22.25,47.12 U2.12
GDR  (via drill 0.3)
  Top 0.15: v92,14.38 92,15 92.12,15.12 J1.2 | R4.1 75,15.38 v74.38,15.38 72.5,15.38 70.88,17 Q3.1
  Bottom 0.15: v92,14.38 91,15.38 v74.38,15.38
GND  (via drill 0.3)
  Top 0.15: 31.62,32.75 32.25,32.75 D11.1 | 31.62,32.75 27.62,32.75 D12.1 | 31.62,32.75 31.62,34.73 | 31.62,34.73 31.62,35.05 31.88,35.3 31.88,36.88 | D10.1 37,32.62 37.62,33.25 37.62,34.62 37.25,35 31.9,35 31.79,34.89 31.62,34.73 | U1.9 37.88,57.5 37.88,55.75 34.12,55.75 U1.4 34,55.62 | 34,55.62 34,50 D9.1 31.88,47.75 31.88,36.88 | C_DELAY.2 52.62,100.38 50.88,102.12 50.88,107.62 RESET_BUTTON.2 | RESET_BUTTON.2 50.75,107.75 47.38,107.75 RESET_BUTTON.1 47.25,107.75 v45.62,107.75 | C10.2 68.25,108.12 65.88,108.12 65.88,107.62 CHANGE_BUTTON.2 65.75,107.62 62.38,107.62 CHANGE_BUTTON.1 62.25,107.5 60.75,106 55,106 | 53.5,108 54.25,107.25 54.25,106.6 54.55,106.3 54.7,106.3 55,106 | IC1.3 47.75,98.5 49.5,98.5 50,98 53.7,98 54.25,98.55 54.25,105.6 54.65,106 55,106 | 53.5,108 53.5,107.75 50.88,107.75 RESET_BUTTON.2 | 53.5,108 C5.2 | 12.75,53.25 12.75,54.38 U2.29_2 | 14,53.25 14,54.38 U2.29_5 | 12.75,53.25 13.88,53.25 U2.29_4 14,53.25 | 12.75,53.25 U2.29_1 | 14,53.25 15.12,53.25 U2.29_7 15.25,53.25 15.25,54.38 U2.29_8 15.25,54.5 15.25,55.62 U2.29_9 15.12,55.75 14,55.75 U2.29_6 13.88,55.75 12.75,55.75 U2.29_3 12.62,55.75 v11.25,55.75 | U2.1 8.25,47.25 v8.25,55.75 8.25,64.62 U2.28 8.25,64.75 | C6.2 28.5,108.12 v27.75,108.12 25.88,108.12 25.88,107.75 BOOT_BUTTON.2 25.75,107.75 22.38,107.75 BOOT_BUTTON.1 22.25,107.62 15.12,100.5 15.12,100.08 | 12.75,97.12 D8.1 | 15.12,96.62 15.12,100.08 | 7.5,99 8.25,99.75 14.8,99.75 15.12,100.08 | v33.12,55.62 34,55.62 | 164.25,57 163.75,56.5 J2.A12 163.75,56.38 163.75,56.25 J2.B1 163.62,56.12 144.5,56.12 140.75,52.38 TP5.TP 140.75,52.25 142.75,50.25 142.75,47.12 139.62,44 127.85,44 127.25,44.6 127.25,46.1 126.97,46.38
  Top 0.15: 164.25,57 164.25,58.12 J2.MP4 | C2.2 157.5,4.38 159,4.38 C1.2 159.12,4.38 159.25,4.5 v159.25,5.5 159.25,6.25 159.38,6.38 SENSOR2.7 159.38,6.5 159.38,6.88 159,7.25 159,9 158.75,9.25 SENSOR2.1 158.75,9.38 158.75,20.3 159.2,20.75 | v161.12,5.5 161.12,6.38 SENSOR2.5 | 159.2,20.75 158.75,20.75 156.47,23.02 156.47,42.79 | 159.2,20.75 164.5,20.75 J3.4 | C4_USB.2 149,51.38 150.62,51.38 151.12,50.88 151.38,50.88 D1.2 151.5,50.75 151.75,50.75 152.25,50.25 152.25,48.12 152.5,47.88 R2-USB1.1 153.88,46.5 153.88,46.38 R2-USB.2 153.88,46.25 153,45.38 153,41.39 153.21,41.19 154.87,41.19 156.47,42.79 | 156.47,52.65 159,50.12 163.62,50.12 J2.B12 163.75,50 163.75,49.75 J2.A1 163.75,49.62 163.75,48.5 163.88,48.38 | 156.47,52.65 155.75,53.38 C5_USB.2 | 163.88,48.38 164.25,48 J2.MP3 163.88,48.38 | 156.47,52.65 156.47,42.79 | 164.25,57 165.38,57 165.38,49.88 163.88,48.38 | R2.1 68.62,12.38 68.62,9.5 SJ1.1 | EPD_C11.2 76.62,19.25 EPD_C12.2 76.5,19.25 76.5,20.75 | 76.5,20.75 76.5,24.88 71.12,30.25 D6.1 | 76.5,20.75 75.75,20.75 | 75.75,20.75 72.75,20.75 70,18 70,13.88 68.62,12.5 R2.1 | 75.75,20.75 75.75,16.12 76.38,15.5 R4.2 76.5,15.38 76.5,13.6 77.35,12.75 80.12,12.75 J1.MP2 80.25,12.75 82.62,12.75 84.5,14.62 84.5,15 84.62,15.12 J1.17 84.75,15.25 84.75,16 86,17.25 88.7,17.25 89.25,17.8 | 87.88,49.38 88.62,50.12 88.62,56.25 87.75,57.12 U3.13 | 95.1,52.62 96.75,52.62 96.75,50.75 95.38,49.38 90.62,49.38 | 95.1,52.62 94.75,52.62 93.62,51.5 C10_SUPERCAP.1 | 87.88,49.38 90.62,49.38 | 87.88,49.38 C8.2 | J1.MP1 93.75,12.75 96.12,15.12 96.12,20.38 95.5,21 EPD_C1.2 95.38,21.12 93.75,21.12 EPD_C2.2 93.62,21.12 91.88,21.12 EPD_C5.2 91.75,21.12 89.25,21.12 EPD_C6.2
  Top 0.15: 89.25,17.8 89.25,18.75 89.88,19.38 89.88,20.38 EPD_C6.2 | 89.25,17.8 89.25,15.25 J1.8 | 82.75,21.12 83.75,21.12 EPD_C9.2 83.88,21.12 85.62,21.12 EPD_C8.2 85.75,21.12 87.25,21.12 EPD_C7.2 87.38,21.12 89.12,21.12 EPD_C6.2 | 82.75,21.12 82.12,21.12 EPD_C10.2 | 82.75,21.12 82.75,27.75 | 82.75,27.75 82.75,30.5 C7.2 | 82.75,27.75 90.12,35.12 D3.1 90.25,35.25 90.25,49 90.62,49.38 | J2.MP1 168.25,48 168.25,58.12 J2.MP2 168.12,58.25 166.12,60.25 140.1,60.25 | 122.12,35 121.03,35 120.62,34.6 120.62,32.5 C1_BAT1.2 120.5,32.5 119.12,33.88 116.88,33.88 R1_PWRUSB.1 116.75,34 116.25,34 115,35.25 C1_BAT2.2 | 122.12,35 122.88,35 IC4.2 | 137.5,47.62 137.5,47.75 U4.9 | 137.5,47.62 137.5,47.12 136.62,47.12 U4.4 | 137.5,47.62 138.5,47.62 U4.6 | 137.5,47.62 U4.9 | 137.5,48.5 136.62,48.5 U4.1 136.5,48.5 134,48.5 C2_BAT.2 133.88,48.5 128.6,48.5 | 137.5,48.5 137.5,47.88 U4.9 | 126.97,46.38 123.05,46.38 122.88,46.2 122.88,45.38 C1_BAT.2 122.88,45.25 122.88,44.25 125.12,42 R2_BAT.1 125.25,41.88 125.25,41 126.33,39.92 | 126.97,46.38 127.55,46.38 | 127.55,46.38 128.62,46.38 MCP73831.2 | 126.33,39.92 129.5,36.75 C3.- | 128.6,48.5 128.3,48.5 128,48.2 128,47.88 127.88,47.75 127.88,46.7 127.55,46.38 | 122.12,35 122.12,36.38 125.67,39.92 126.33,39.92 | 137.5,48.5 137.5,59.1 | R2.1 68.5,12.5 42.38,12.5 26.25,28.62 26.25,35.8 26.95,36.5 31.5,36.5 31.88,36.88 | 128.6,48.5 128,49.1 128,53.88 126.62,55.25 TP4.TP 126.5,55.25 96.5,55.25 95.5,54.25 95.5,53.02 95.1,52.62
  Top 0.152: 140.1,60.25 138.65,60.25 137.5,59.1
  Bottom 0.15: v8.25,55.75 v11.25,55.75 33,55.75 v33.12,55.62 | v45.62,107.75 45.25,108.12 v27.75,108.12 | v159.25,5.5 v161.12,5.5
  pour Top: 6.86,46.66 6.84,46.64 6.82,46.62 0.08,46.62 0.08,0.08 77.62,0.08 77.62,10.02 77.64,10.04 77.66,10.06 77.68,10.08 95.92,10.08 95.94,10.06 95.96,10.04 95.98,10.02 95.98,0.08 170.12,0.08 170.12,67.12 92.18,67.12 92.16,67.14 92.14,67.16 92.12,67.18 92.12,111.12 68.98,111.12 68.98,110.08 68.96,110.06 68.94,110.04 68.92,110.02 17.38,110.02 17.36,110.04 17.34,110.06 17.32,110.08 17.32,111.12 0.08,111.12 0.08,65.18 6.82,65.18 6.84,65.16 6.86,65.14 6.88,65.12 6.88,46.68
  pour Bottom: 6.86,46.66 6.84,46.64 6.82,46.62 0.08,46.62 0.08,0.08 77.62,0.08 77.62,10.02 77.64,10.04 77.66,10.06 77.68,10.08 95.92,10.08 95.94,10.06 95.96,10.04 95.98,10.02 95.98,0.08 170.12,0.08 170.12,67.12 92.18,67.12 92.16,67.14 92.14,67.16 92.12,67.18 92.12,111.12 68.98,111.12 68.98,110.08 68.96,110.06 68.94,110.04 68.92,110.02 17.38,110.02 17.36,110.04 17.34,110.06 17.32,110.08 17.32,111.12 0.08,111.12 0.08,65.18 6.82,65.18 6.84,65.16 6.86,65.14 6.88,65.12 6.88,46.68
GPIO8
  Top 0.15: R1.1 19.75,43 19.62,43.12 19.62,47.12 U2.10
I2C_PW  (via drill 0.3)
  Top 0.15: R1-PINH.2 160.75,4.38 162.25,4.38 R2-PINH.2 | R1-PINH.2 160.62,4.38 160.62,6.12 160.38,6.38 SENSOR2.6 160.25,6.5 160.25,6.75 159.75,7.25 159.75,9 159.5,9.25 SENSOR2.2 | 156.25,6.38 158.62,6.38 SENSOR2.8 | v22.75,62.5 22.75,64.12 22.25,64.62 U2.17 | v96,54.12 114.25,35.88 114.25,33.5 141.38,6.38 156.25,6.38 | R1-PINH.2 160.62,4.25 159.5,3.12 159.12,3.12 C1.1 159,3 157.5,3 C2.1 157.38,3.12 156.62,3.88 156.62,6 156.25,6.38
  Bottom 0.15: v22.75,62.5 24,61.25 86.38,61.25 93.5,54.12 v96,54.12
INT_RTC  (via drill 0.3)
  Top 0.15: TP15.TP 82.12,68 82.12,65.5 83.75,63.88 R1-PINH1.1 83.75,63.75 81.25,61.25 v81.25,59.62 | v22.38,52.75 17.62,48 17.62,47.75 17.12,47.25 U2.8 | v74.38,52.75 76.38,54.75 76.38,57.88 76.88,58.38 78,58.38 U3.3
  Bottom 0.15: v22.38,52.75 v74.38,52.75 v81.25,59.62
IO/BOOT
  Top 0.15: R_BOOT.2 19.88,108.12 21.25,108.12 22.25,109.12 BOOT_BUTTON.4 22.38,109.25 25.75,109.25 BOOT_BUTTON.3 25.88,109.12 28.75,109.12 29.25,108.62 29.25,107.62 28.62,107 C6.1 28.5,106.88 28.5,68.5 24.75,64.75 U2.15
IO/CHANGE  (via drill 0.3)
  Top 0.15: C10.1 68.38,106.88 69,107.5 69,108.62 68.62,109 65.88,109 CHANGE_BUTTON.3 65.75,109.12 62.38,109.12 CHANGE_BUTTON.4 62.33,109.11 61.38,108.15 61.38,108.12 60.12,108.12 R_CHANGE.2 60,108.12 v59.38,107.5 | v15.12,65.88 15.12,65.25 14.62,64.75 U2.23
  Bottom 0.15: v15.12,65.88 56.75,107.5 v59.38,107.5
MISO  (via drill 0.3)
  Top 0.15: v33.12,57.25 34,58.12 U1.2 | v9.75,63.5 9.5,63.75 9.5,64.62 U2.27 9.5,64.75 9.5,73.25 11.62,75.38 TP6.TP | v5.25,92.5 6.5,92.5 J4.P7
  Bottom 0.15: v33.12,57.25 33,57.38 15.88,57.38 v9.75,63.5 9.75,76.75 7.25,76.75 7.25,79.5 4.5,82.25 | 4.5,82.25 v4.12,82.62 | v5.25,92.5 5.25,82.25 4.5,82.25
MOSI  (via drill 0.3)
  Top 0.15: v86.12,16 86.12,15.25 J1.14 | v42.38,48.75 41.88,49.25 v41.88,49.75 41.88,55.62 U1.5 | v16.38,48.38 16.38,47.75 15.88,47.25 U2.7 | v8.12,65.88 8.12,75.38 TP7.TP 8,75.5 7.75,75.75 v7.75,77.25 | v7.75,88.25 6.75,88.25 J4.P3
  Bottom 0.15: v86.12,16 85.75,16.38 74.75,16.38 v42.38,48.75 | 17.75,49.75 v16.38,48.38 | v41.88,49.75 17.75,49.75 | v8.12,65.88 8.12,56.25 7.75,55.88 7.75,49.75 17.75,49.75 | v7.75,77.25 v7.75,88.25
N$1
  Top 0.15: R2-USB.1 152.5,46.38 149.27,49.61 148.41,49.61 148.05,49.96 148.05,51.67 151.12,54.75 163.62,54.75 J2.B5
N$2
  Top 0.15: IC1.5 50.5,99.5 50.88,99.12 52.62,99.12 C_DELAY.1
N$3
  Top 0.15: J1.24 81.12,15.25 78.67,15.25 78.12,15.8 78.12,16.38 76.62,17.88 EPD_C12.1
N$4
  Top 0.15: C1_BAT1.1 119.25,32.38 120,31.62 122.6,31.62 122.88,31.9 IC4.3 123,34.12 123.62,34.75 123.62,35.38 | 123.62,35.38 123,36 IC4.1 | Q1.2 136.25,42.62 136.25,37.5 133,34.25 D2.1 132.88,34.25 132.88,34.88 128.88,34.88 128.12,35.62 128.12,36.3 127.8,36.62 124.88,36.62 123.62,35.38
N$5
  Top 0.15: R2_BAT.2 125.25,43.38 126,44.12 126,45.38 MCP73831.5
N$6
  Top 0.15: CHG_LED.C 121.88,47.25 R1_BAT.2
N$8  (via drill 0.3)
  Top 0.15: v119.25,45.88 118,47.12 R1_BAT.1 | v127.75,45.88 128.62,45.88 128.62,45.5 MCP73831.1
  Bottom 0.15: v127.75,45.88 v119.25,45.88
N$9
  Top 0.15: C4.1 97.17,35.83 93.88,35.83 93.75,35.7 93.75,35.25 D3.2 93.62,35.12 93.62,34.25 90.25,30.88 D4.1
N$10
  Top 0.15: R8.1 27.38,28.62 26.62,29.38 26.62,33.38 27.5,34.25 D12.2
N$11  (via drill 0.3)
  Top 0.15: v154.5,48.5 154.5,48.38 154,47.88 R2-USB1.2 | v162.38,51 162.88,51.5 162.88,51.62 163,51.75 163.62,51.75 J2.A5
  Bottom 0.15: v154.5,48.5 157,51 v162.38,51
N$12
  Top 0.15: R7.1 33.12,29.38 33.12,33.38 32.38,34.12 D11.2
N$13
  Top 0.15: J1.22 82.12,15.25 82.12,19.75 EPD_C10.1
N$14
  Top 0.15: R6.1 37,28.75 36.25,29.5 36.25,33.38 36.88,34 D10.2
N$15
  Top 0.15: J1.20 83.25,15.25 83.25,17.38 85.62,19.75 EPD_C8.1
N$16
  Top 0.15: J1.19 83.75,15.25 83.75,16 87.25,19.5 87.25,19.75 EPD_C7.1
N$17
  Top 0.15: J1.18 84.25,15.25 84.25,16 87.38,19.12 89.12,19.12 89.12,19.75 EPD_C6.1
N$18
  Top 0.15: R5.1 30.25,48 31.5,49.25 31.75,49.25 D9.2
N$19
  Top 0.15: R9.1 68.12,33.12 68.68,33.12 70.5,31.31 72.06,31.31 72.38,31 72.38,30.5 72.5,30.38 D6.2
N$20
  Top 0.15: R10.1 8.88,97.75 12.12,97.75 12.25,97.88 14.1,97.88 14.25,97.72 14.25,97.25 D8.2
N$21
  Top 0.15: R_CAPACITOR.2 91.25,51.38 90,52.62 90,64.25 89.62,64.62 87,64.62 87,64 D7.1
N$26
  Top 0.15: J1.5 90.75,15.25 90.75,16.88 93.62,19.75 EPD_C2.1
N$28
  Top 0.15: J1.4 91.25,15.25 91.25,15.75 95.38,19.88 EPD_C1.1
PREVGH  (via drill 0.3)
  Top 0.15: J1.21 82.75,15.25 82.75,18.75 83.75,19.75 EPD_C9.1 83.75,19.88 v83.12,20.5 | v79.25,24.38 79.25,39.88 80.25,40.88 D5.1
  Bottom 0.15: v83.12,20.5 v79.25,24.38
PREVGL  (via drill 0.3)
  Top 0.15: J1.23 81.62,15.25 81.5,15.38 81.5,15.75 v80.25,17 79.38,17.88 78.38,17.88 EPD_C11.1 | v90.88,27.62 90.88,28 93.62,30.75 D4.2
  Bottom 0.15: v80.25,17 v90.88,27.62
RESE
  Top 0.15: 72.62,11.47 72.62,9.88 73.38,9.12 R3.1 | J1.3 91.62,15.12 91.5,15 91.5,14.62 87.88,11 73.1,11 72.62,11.47 | 72.62,11.47 72.62,13.88 70.88,15.62 Q3.2
RESE'
  Top 0.15: R2.2 69.88,12.38 70.25,12 70.25,9.5 SJ1.2 70.38,9.38 70.38,8.5 73.88,8.5 74.12,8.75 74.12,9.75 73.5,10.38 R3.2
RESET  (via drill 0.3)
  Top 0.15: 48.62,101.12 47.88,101.12 47.75,101 47.75,100.62 IC1.1 47.62,100.62 46.12,102.12 46.12,106.62 44.75,108 R_RESET.2 44.75,108.12 44.75,108.88 45,109.12 47.25,109.12 RESET_BUTTON.4 | 48.85,101.12 51,101.12 51.25,100.88 51.25,100 51.5,99.75 53.25,99.75 53.38,99.88 53.38,106.62 53.5,106.75 C5.1 | 48.85,101.12 48.62,101.12 | v11.62,63.5 10.75,62.62 10.75,47.25 U2.3 | 48.62,101.12 48.62,100.9 | 48.62,100.9 v48.62,100.5 | 48.62,100.9 48.85,101.12
  Bottom 0.15: v48.62,100.5 v11.62,63.5
RTC_RST  (via drill 0.3)
  Top 0.15: v28.62,59.25 24,63.88 24,64.12 23.5,64.62 U2.16 | v76.88,57.75 77.75,57.75 78,57.5 78,57.12 U3.4
  Bottom 0.15: v28.62,59.25 30.12,57.75 v76.88,57.75
RX
  Top 0.15: U2.24 13.38,64.75 13.88,65.25 13.88,66.75 15.62,68.5 TP2.TP
SCK  (via drill 0.3)
  Top 0.15: v86.5,14.38 86.5,15 86.62,15.12 J1.13 | v69.5,14.38 42.88,41 v42.88,50.25 42.88,55.88 U1.6 | v15.12,50.25 v15.12,49.25 15.12,47.75 14.62,47.25 U2.6 | v6.62,65.88 6.62,73.25 4.5,75.38 TP8.TP | v4.75,90.25 6.5,90.25 J4.P5
  Bottom 0.15: v69.5,14.38 v86.5,14.38 | v42.88,50.25 v15.12,50.25 | v15.12,49.25 15,49.38 7.38,49.38 7.38,65.12 v6.62,65.88 6.5,66 3.5,66 3.5,89 v4.75,90.25
SCL  (via drill 0.3)
  Top 0.15: R2-PINH.1 162.38,3.12 163.2,3.12 163.38,3.3 163.38,7 161.12,9.25 SENSOR2.4 161.12,9.38 164.5,12.75 164.5,17.75 J3.1 164.5,17.88 164.5,18.1 164.35,18.25 v163.5,18.25 | 139.12,48 138.62,48 U4.7 | v139.12,46.38 139.12,48 | v18.88,63.5 18.88,64.12 18.38,64.62 U2.20 | v86.62,61.62 87.25,61 U3.16 | v139.12,53.5 139.12,48
  Bottom 0.15: v139.12,46.38 163.5,22 v163.5,18.25 | v18.88,63.5 19.38,63 85.25,63 v86.62,61.62 131,61.62 v139.12,53.5
SDA  (via drill 0.3)
  Top 0.15: v20.12,62.5 20.12,64.12 19.62,64.62 U2.19 | v85.88,60.75 86.88,59.75 87.25,59.75 U3.15 | R1-PINH.1 160.75,3.12 161.4,3.12 161.62,3.35 161.62,3.5 161.88,3.75 162.83,3.75 163,3.92 163,6.38 160.38,9 160.38,9.25 SENSOR2.3 160.38,9.38 160.62,9.62 160.62,16 163.38,18.75 164.5,18.75 J3.2 164.62,18.88 164.88,18.88 165.75,19.75 165.75,59.07 165.32,59.5 144.5,59.5 138.62,53.62 | 138.62,53.62 138.62,48.62 U4.8 | 138.62,53.62 v138.38,53.62
  Bottom 0.15: v20.12,62.5 21.88,60.75 v85.88,60.75 93,53.62 v138.38,53.62
SRC  (via drill 0.3)
  Top 0.15: v94.25,40.12 98.62,35.75 C4.2 | D5.2 83.88,40.88 v84.62,40.12 84.62,39.75 79.88,35 L1.1 | v72.88,20.25 72.88,16.38 Q3.3
  Bottom 0.15: v94.25,40.12 v84.62,40.12 73.4,40.12 72.38,39.1 72.38,31.88 72.88,31.38 v72.88,20.25
SS_SD  (via drill 0.3)
  Top 0.15: v15.88,58.62 15.88,52.75 12.5,49.38 12.5,47.75 12,47.25 U2.4 | J4.P2 7,87 10.5,83.5 10.5,82.75 v10.62,82.75
  Bottom 0.15: v15.88,58.62 10.75,63.75 10.75,82.75 v10.62,82.75
TX
  Top 0.15: U2.25 12,68.5 TP1.TP
USB_D+  (via drill 0.3)
  Top 0.15: v149.75,51.88 151.38,51.88 D1.1 | v28.25,50.75 24.75,47.25 U2.14
  Bottom 0.15: v149.75,51.88 148.62,50.75 v28.25,50.75
USB_D-  (via drill 0.3)
  Top 0.15: v150.25,49.88 151.38,49.88 D1.3 | v25.12,49.25 23.5,47.62 23.5,47.25 U2.13
  Bottom 0.15: v150.25,49.88 149.62,49.25 v25.12,49.25
VBAT
  Top 0.15: U4.2 136.62,48 136.62,47.62 U4.3 136.5,47.5 134,47.5 | Q1.3 135.25,44.75 135.25,45.5 135.62,45.88 | 134,47.5 134,47.25 C2_BAT.1 134,47.12 135.25,45.88 135.62,45.88 | 134,47.5 128.75,47.5 MCP73831.3 | 135.62,45.88 139.75,45.88 141.5,47.62 TP3.TP
VBUS  (via drill 0.3)
  Top 0.3: MCP73831.4 126,47.38 126,47.25 123.5,47.25 CHG_LED.A 123.38,47.12 122.9,47.12 122.62,46.85 122.62,46.62 121.62,45.62 121.62,45.38 C1_BAT.1 121.5,45.25 121.5,39.88 116.88,35.25 R1_PWRUSB.2 | TP14.TP 126.62,51.38 126.12,50.88 126.12,47.5 MCP73831.4 | D2.2 133,36.38 134.25,37.62 134.25,42.62 Q1.1 134.5,42.62 v135.38,43.5 | v149.75,50.25 149,50.25 C4_USB.1 | 153.88,50.5 v152.88,50.5 | 153.88,50.5 153.88,50.75 D1.5 | 155.06,51.56 154,50.5 153.88,50.5 | 155.06,51.56 155.62,52.12 C5_USB.1 | PFMF.050.1.2 154.12,43.25 155.12,44.25 155.12,51.5 155.06,51.56 | v127.38,47.38 126.25,47.38 MCP73831.4
  Bottom 0.3: v149.75,50.25 150,50.5 151.5,50.5 | v152.88,50.5 151.5,50.5 | 151.5,50.5 151.5,50.38 150,48.88 140.75,48.88 v135.38,43.5 131.25,43.5 v127.38,47.38
VRTC
  Top 0.15: C10_SUPERCAP.2 95.62,51.38 95.62,50.45 95.3,50.12 91.38,50.12 R_CAPACITOR.1 91.25,50.12 89.88,50.12 89,51 89,57.12 87.75,58.38 87.38,58.38 U3.14 87.25,58.38 87,58.38 86.12,57.5 86.12,49.62 86.38,49.38 C8.1
VUSB
  Top 0.3: J2.A4 163.75,50.62 163.75,50.75 J2.B9 163.88,50.75 164.25,50.75 164.88,51.38 164.88,54.88 164.38,55.38 163.88,55.38 J2.B4 | J2.B4 163.75,55.38 163.75,55.62 J2.A9 | J2.B4 163.62,55.38 149.35,55.38 147.6,53.62 147.6,45.15 149.5,43.25 PFMF.050.1.1

## Text on the board
tPlace: Serial No.: | MOSI | SCK | MISO | TX | RX | INT_RTC | GND | GND | VBUS | VBAT | 3V3 | EPD_3V3 | EPD_BUSY | EPD_DC | EPD_RST | EPD_CS | EPD_3V3_C | OpenBook v1.1